# Altium PCB line.PcbDoc
Units mm, origin at the board's own origin, x right, y up, seen from the top; angles counter-clockwise.
Board outline 127.51 x 51.78 mm, 2 copper layers (Top Layer, Bottom Layer); 24 components, 14 nets, 54 pads, 0 vias.
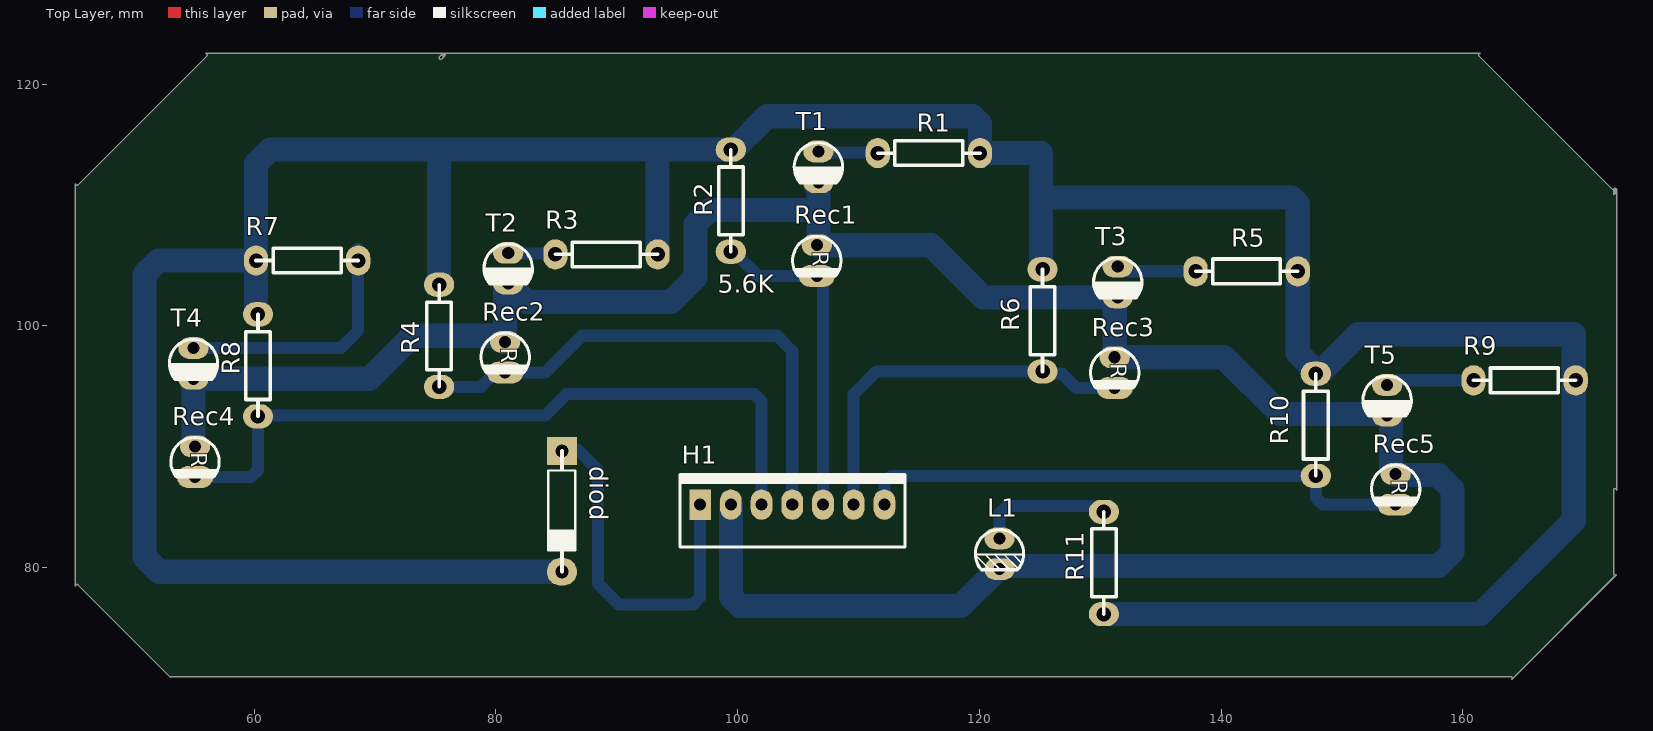
[diagram p0: Top Layer view]
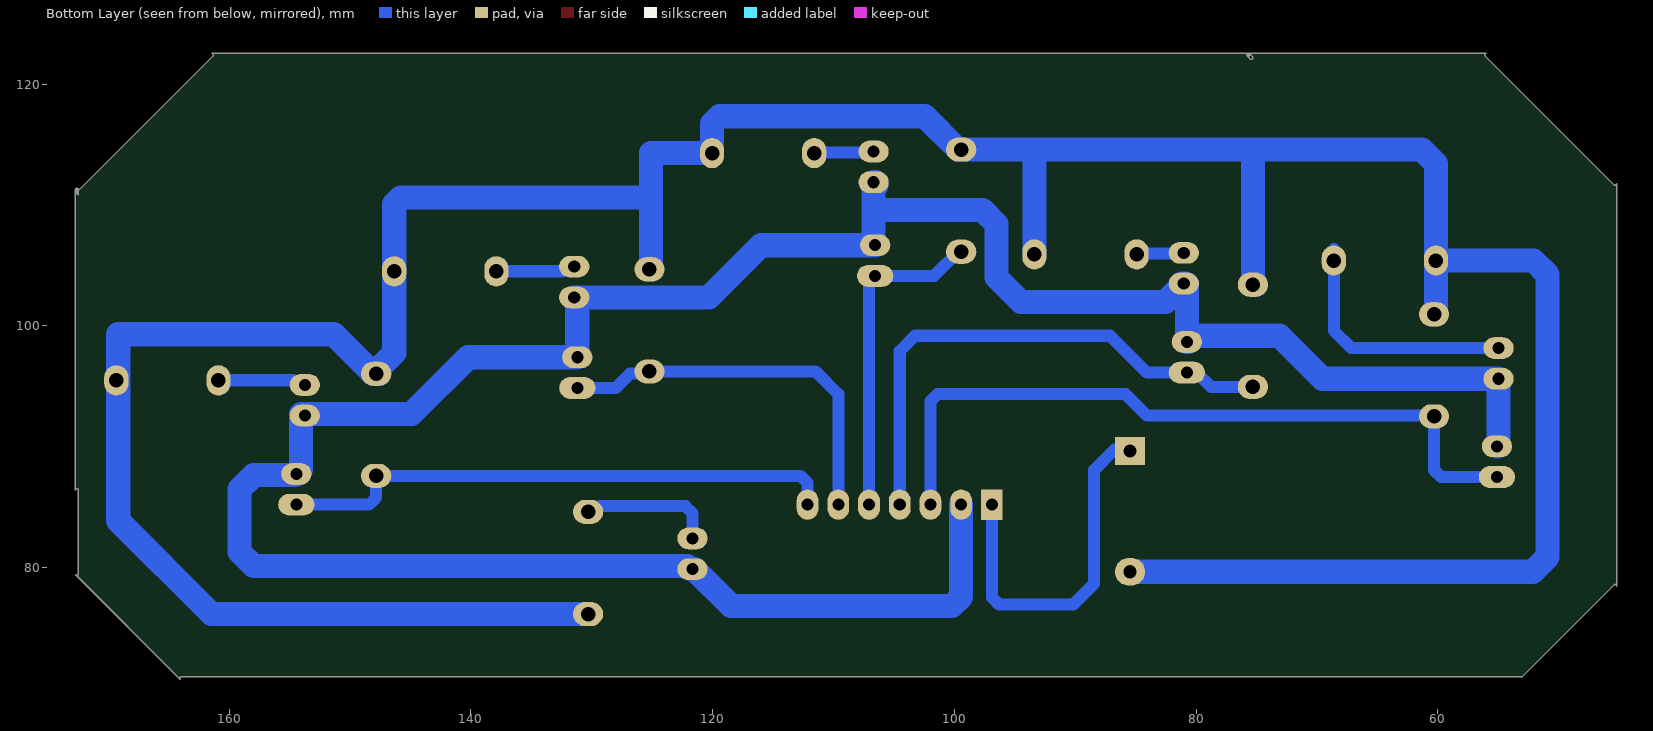
[diagram p1: Bottom Layer view, seen from below]
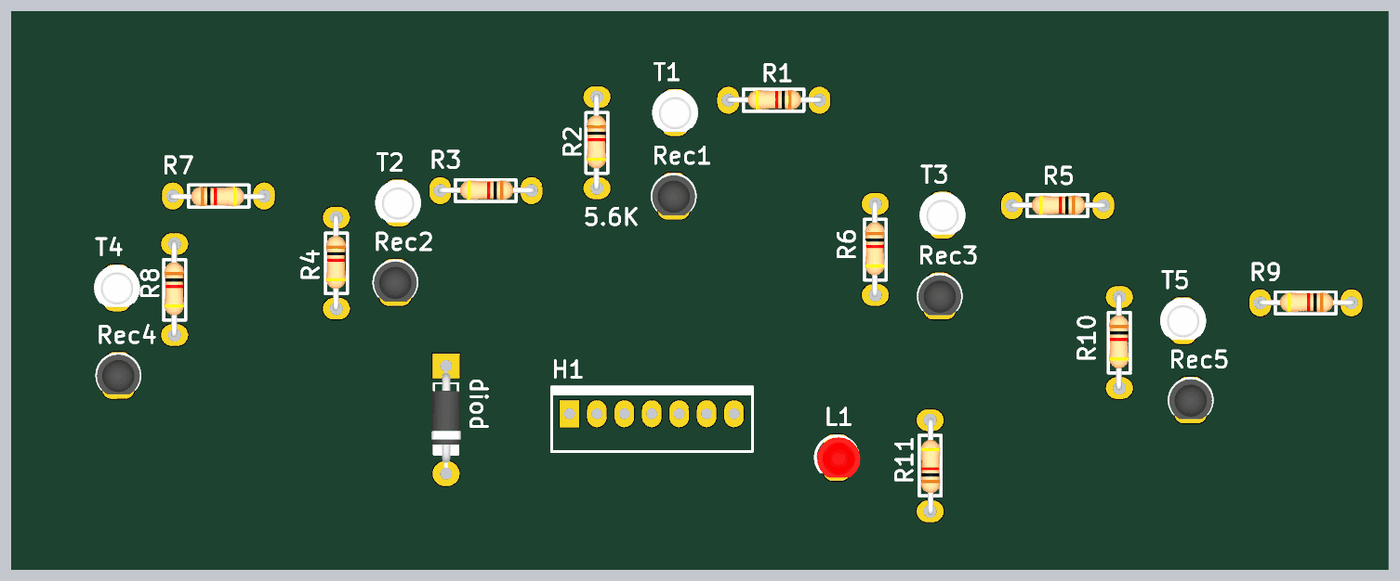
[diagram p2: 3D render of the assembled board from above, using the file's embedded part models]

## Layer stack, top to bottom
Top Solder: solder mask 0.0102, Solder Resist, Dk 3.5
Top Layer: signal copper 0.0356
Dielectric 1: dielectric 0.32, FR-4, Dk 4.8
Bottom Layer: signal copper 0.0356
Bottom Solder: solder mask 0.0102, Solder Resist, Dk 3.5

## Board outline
45.212,78.486 cw(c45.339,78.486) 45.429,78.576 53.049,70.956 53.012,70.993 163.904,70.993 163.957,70.993 cw(c163.957,70.866) 164.084,70.866 164.047,70.776 172.683,79.412 172.683,79.411 cw(c172.593,79.502) 172.466,79.502 172.466,86.423 cw(c172.593,86.423) 172.72,86.423 172.72,111.252 ccw(c172.593,111.252) 172.593,111.379 ccw(c172.593,111.252) 172.466,111.252 172.466,110.871 ccw(c172.466,110.998) 172.593,110.998 172.593,111.379 cw(c172.466,111.379) 172.466,111.252 172.376,111.289 161.327,122.338 cw(c161.417,122.428) 161.417,122.555 75.692,122.555 cw(c75.692,122.428) 75.819,122.428 75.782,122.338 75.528,122.084 cw(c75.438,122.174) 75.348,122.264 75.602,122.518 75.601,122.518 ccw(c75.692,122.428) 75.629,122.318 ccw(c75.565,122.428) 75.692,122.428 ccw(c75.565,122.428) 75.629,122.538 75.565,122.555 56.007,122.555 cw(c56.007,122.428) 56.134,122.428 56.097,122.338 45.429,111.67 cw(c45.339,111.76) 45.212,111.76

## Design rules (kind name [scope] priority, off if disabled: settings)
Clearance [All] p1: gap=0.254 ignorepadtopadclearanceinfootprint=FALSE
PolygonConnect [All] p1: connectstyle=Relief reliefconductorwidth=0.254 reliefentries=4 polygonreliefangle="90 Angle" airgapwidth=0.254
RoutingVias [All] p1: holewidth=0.711 width=1.27 viastyle="Through Hole" minholewidth=0.711 minwidth=1.27 maxholewidth=0.711 maxwidth=1.27
SolderMaskExpansion [All] p1: expansion=0.102 istentingtop=FALSE
SupplyNets "Schematic Supply Nets_5" [InNet('V')] p1: voltage=0.000
SupplyNets "Schematic Supply Nets_8" [InNet('SC')] p2: voltage=0.000
SupplyNets "Schematic Supply Nets_6" [InNet('SR2')] p3: voltage=0.000
SupplyNets "Schematic Supply Nets_4" [InNet('SL2')] p4: voltage=0.000
SupplyNets "Schematic Supply Nets_3" [InNet('SL1')] p5: voltage=0.000
SupplyNets "Schematic Supply Nets_2" [InNet('SR1')] p6: voltage=0.000
SupplyNets "Schematic Supply Nets_1" [InNet('GND')] p7: voltage=0.000
SupplyNets "Schematic Supply Nets" [InNet('VCC')] p8: voltage=0.000
Width [All] p1: maxlimit=2 minlimit=1 preferedwidth=2
30 further rules are at their usual default settings.

## Components (designator, comment, footprint, x,y, rotation, side; value= is the part's Value field where it differs from the comment)
diod "Comment" 1N5819 85.471,89.662 r270 top
H1 "Header 7" mokhaberati7 96.901,85.217 r0 top
L1 "LED" LED_3 121.666,81.153 r270 top
R1 "220" res_1 115.824,114.3 r180 top
R2 "5.6K" res_1 99.441,110.363 r270 top
R3 "220" res_1 89.154,105.918 r180 top
R4 "5.6K" res_1 75.307,99.187 r270 top
R5 "220" res_1 142.113,104.521 r180 top
R6 "5.6K" res_1 125.222,100.457 r270 top
R7 "220" res_1 64.389,105.41 r0 top
R8 "5.6K" res_1 60.325,96.74 r270 top
R9 "220" res_1 165.1,95.504 r180 top
R10 "5.6K" res_1 147.828,91.821 r270 top
R11 "1K" res_1 130.302,80.391 r90 top
Rec1 "Rec" ir_3m_r 106.553,106.68 r270 top
Rec2 "Rec" ir_3m_r 80.772,98.679 r270 top
Rec3 "Rec" ir_3m_r 131.191,97.409 r270 top
Rec4 "Rec" ir_3m_r 55.118,90.043 r270 top
Rec5 "Rec" ir_3m_r 154.432,87.757 r270 top
T1 "T_IR" ir_3m 106.68,114.427 r270 top
T2 "T_IR" ir_3m 81.026,106.045 r270 top
T3 "T_IR" ir_3m 131.445,104.902 r270 top
T4 "T_IR" ir_3m 54.991,98.171 r270 top
T5 "T_IR" ir_3m 153.733,95.123 r270 top

## Footprints (in the part's own frame and the unit in brackets; to place one, negate y for a bottom-side part, rotate by r counter-clockwise, add the part's x,y. Pads: shape width x height; smd on the part's side, far side on the other; paste and mask are expansions set on the pad)
1N5819 [mm] "www.Pishnam.com"
  rect 2.3x2.5 hole 1.1: 1(0,0)
  oval 2.3x2.5 hole 1.1: 2(10,0)
  silkscreen extent 0,-1.13 10,1.1, body extent 0.6,-1.33 9.01,1.34, height 3.33
ir_3m [mm]
  oval 1.8x2.5 hole 1 paste-2539.97 mask+0.102: 1(0,0) 2(2.54,0)
  silkscreen extent -0.73,-2 2.59,2, body extent -0.67,-2 3.05,2, height 5.18
ir_3m_r [mm]
  oval 1.8x2.5 hole 1 paste-2539.97 mask+0.102: 1(0,0)
  oval 1.8x3 hole 1 paste-2539.97 mask+0.102: 2(2.54,0)
  silkscreen extent -0.73,-2 2.55,2, body extent -0.67,-2 3.05,2, height 5.18
LED_3 [mm] "www.Pishnam.com"
  oval 1.8x2.5 hole 1: 1(-1.27,0) 2(1.27,0)
  round 0.3 on Top Overlay: 1(0,0)
  silkscreen extent -2,-2.01 1.38,2, body extent -1.88,-1.83 1.84,2.17, height 5.08
mokhaberati7 [mm]
  rect 1.8x2.5 hole 1: 1(0,0)
  oval 1.8x2.5 hole 1: 2(2.54,0) 3(5.08,0) 4(7.62,0) 5(10.16,0) 6(12.7,0) 7(15.24,0)
  silkscreen extent -1.65,-3.5 16.94,2.5
res_1 [mm] "www.Pishnam.com"
  oval 2x2.5 hole 1.2: 1(-4.225,0) 2(4.225,0)
  silkscreen extent -4.22,-1.02 4.23,1.02, body extent -4.54,-0.96 4.42,0.88, height 1.92

## Part data
H1: "Header, 7-Pin", طراحی توسط="مهندس محمد رفیعی", وب سایت=www.Pishnam.com, کانال تلگرام=@Pishnam
R1 R2 R3 R4 R5 R6 R7 R8 R9 R10 R11: library part Resistor, "Resistor", طراحی توسط="مهندس محمد رفیعی", وب سایت=www.Pishnam.com, کانال تلگرام=@Pishnam
Rec1 Rec2 Rec3 Rec4 Rec5: library part Receiver_ir, "Receiver_ir", طراحی توسط="مهندس محمد رفیعی", وب سایت=www.Pishnam.com, کانال تلگرام=@Pishnam
T1 T2 T3 T4 T5: library part Transmiter, "INFRARED", طراحی توسط="مهندس محمد رفیعی", وب سایت=www.Pishnam.com, کانال تلگرام=@Pishnam
L1: طراحی توسط="مهندس محمد رفیعی", وب سایت=www.Pishnam.com, کانال تلگرام=@Pishnam

## Nets (pads, with @x,y where several pads share a name; then routed paths per layer and width w, separated by ;. In a path a pad name is that pad's centre, name@x,y a point inside that pad or via, vN(x,y) a via of type N, cw(c..) or ccw(c..) an arc to the next point about the centre after c; other vN are vias at no path point)
GND: H1.2 L1.2 Rec1.1 Rec2.1 Rec3.1 Rec4.1 Rec5.1 T1.2 T2.2 T3.2 T4.2 T5.2 | length 217.3
  Bottom Layer w2: T4.2 54.991,90.143 55.091,90.043 Rec4.1 ; T4.2@55.241,95.631 69.547,95.631 73.103,99.187 80.114,99.187 80.622,98.679 Rec2.1 80.772,103.251 80.776,103.255 80.776,103.405 80.876,103.505 T2.2 81.176,103.505 81.276,103.405 81.276,103.255 82.55,101.981 94.488,101.981 96.522,104.015 96.522,108.429 97.694,109.601 106.68,109.601 ; H1.2 99.441,77.597 100.203,76.835 118.468,76.835 121.516,79.883 121.816,79.883 122.07,80.137 157.959,80.137 159.131,81.309 159.131,86.485 157.959,87.657 154.532,87.657 Rec5.1 154.282,87.757 154.182,87.857 154.182,88.007 154.051,88.138 154.051,92.71 144.92,92.71 140.221,97.409 Rec3.1 131.191,102.258 T3.2@131.295,102.362 ; T1.2@106.43,111.637 106.43,111.787 106.53,111.887 T1.2 106.68,109.601 ; Rec1.1 Rec1.1@106.58,106.68 ; T3.2 T3.2@131.295,102.362 ; Rec1.1@106.58,106.68 116.001,106.68 120.319,102.362 T3.2@131.295,102.362 ; Rec1.1@106.58,106.68 106.68,106.78 106.68,109.601
NetL1_1: L1.1@121.666,82.423 R11.2 | length 11.2
  Bottom Layer w1: L1.1@121.666,82.423 121.666,84.504 122.252,85.09 129.307,85.09 129.781,84.616 R11.2
NetR1_2: R1.2 T1.1 | length 5
  Bottom Layer w1: T1.1 106.743,114.364 111.535,114.364 R1.2
NetR3_2: R3.2 T2.1 | length 4
  Bottom Layer w1: T2.1 81.09,105.981 84.865,105.981 R3.2
NetR5_2: R5.2 T3.1 | length 6.6
  Bottom Layer w1: T3.1 132.011,104.902 132.392,104.521 R5.2
NetR7_2: R7.2 T4.1 | length 21
  Bottom Layer w1: T4.1 67.183,98.171 68.614,99.602 R7.2 R7.2@68.614,106.38
NetR9_2: R9.2 T5.1 | length 7.3
  Bottom Layer w1: T5.1 154.3,95.123 154.681,95.504 R9.2
sc: H1.5 R2.2 Rec1.2 | length 27
  Bottom Layer w1: R2.2 99.691,106.138 101.689,104.14 Rec1.2 ; Rec1.2@106.691,104.14 107.061,103.77 H1.5
SL1: H1.6 R6.2 Rec3.2 | length 32.1
  Bottom Layer w1: H1.6 109.601,94.361 111.472,96.232 R6.2 125.399,96.055 126.83,96.055 128.016,94.869 Rec3.2
SL2: H1.7 R10.2 Rec5.2 | length 46.6
  Bottom Layer w1: H1.7 112.141,87.01 112.727,87.596 R10.2@148.078,87.596 ; R10.2 147.828,85.803 148.414,85.217 Rec5.2
SR1: H1.4 R4.2 Rec2.2 | length 44.4
  Bottom Layer w1: R4.2@75.057,94.962 78.779,94.962 79.956,96.139 Rec2.2 84.074,96.139 87.122,99.187 103.251,99.187 104.521,97.917 H1.4
SR2: H1.3 R8.2 Rec4.2 | length 61.1
  Bottom Layer w1: Rec4.2 59.739,87.503 60.325,88.089 R8.2 ; R8.2@60.262,92.612 61.219,92.612 61.248,92.583 84.074,92.583 85.852,94.361 101.395,94.361 101.981,93.775 H1.3
V: diod.1 H1.1 | length 30.7
  Bottom Layer w1: diod.1@84.963,89.789 86.741,89.789 88.456,88.075 88.456,78.676 90.17,76.962 96.315,76.962 96.901,77.548 H1.1
VCC: diod.2 R1.1 R2.1 R3.1 R4.1 R5.1 R6.1 R7.1 R8.1 R9.1 R10.1 R11.1 | length 296
  Bottom Layer w2: R8.1 60.164,100.965 R7.1 ; R4.1@75.057,103.412 R4.1 75.307,103.662 75.311,103.666 75.311,114.588 ; diod.2 52.164,79.662 50.927,80.899 50.927,104.238 52.099,105.41 R7.1 ; R3.1 93.379,114.588 ; R6.1 125.095,104.682 125.095,110.617 ; R11.1 161.442,76.166 169.164,83.888 169.164,99.314 151.346,99.314 R10.1@148.078,96.046 ; R10.1 147.578,96.046 147.578,96.516 146.338,97.756 R5.1 146.338,110.075 145.796,110.617 125.095,110.617 ; R7.1 60.164,113.416 61.336,114.588 75.311,114.588 ; 75.311,114.588 93.379,114.588 ; 93.379,114.588 R2.1 99.691,114.588 102.451,117.348 119.429,117.348 120.049,116.728 R1.1 125.095,114.3 125.095,110.617
pads on no net: L1.1@121.666,81.153

## Silkscreen, mask and mechanical layers (free items; w line width, h text height)
Mechanical 1:
  lines w0.254: 45.466,89.789 45.466,96.361 ; 67.056,122.428 75.565,122.428 ; 67.818,122.428 56.007,122.428 45.339,111.76 45.339,78.486 52.959,70.866 163.957,70.866 172.593,79.502 172.593,86.423 172.593,111.252 ; 75.438,122.174 75.692,122.428 161.417,122.428 172.466,111.379 172.466,110.998

## Text inside footprints (layer, text, board x,y; h text height)
Rec1: Top Overlay "R" at 105.768,106.182 h2.3 r270
Rec2: Top Overlay "R" at 79.987,98.181 h2.3 r270
Rec3: Top Overlay "R" at 130.406,96.911 h2.3 r270
Rec4: Top Overlay "R" at 54.333,89.545 h2.3 r270
Rec5: Top Overlay "R" at 153.647,87.259 h2.3 r270